# Altium PCB Edge_logic_analyzer.PcbDoc (part 2 of 3)
Units mm, origin at the board's own origin, x right, y up, seen from the top; angles counter-clockwise.
Board outline 76.03 x 55 mm, 4 copper layers (L1, L2, L3, L4), stack 1.527 mm thick; 110 components, 90 nets, 430 pads, 763 vias.
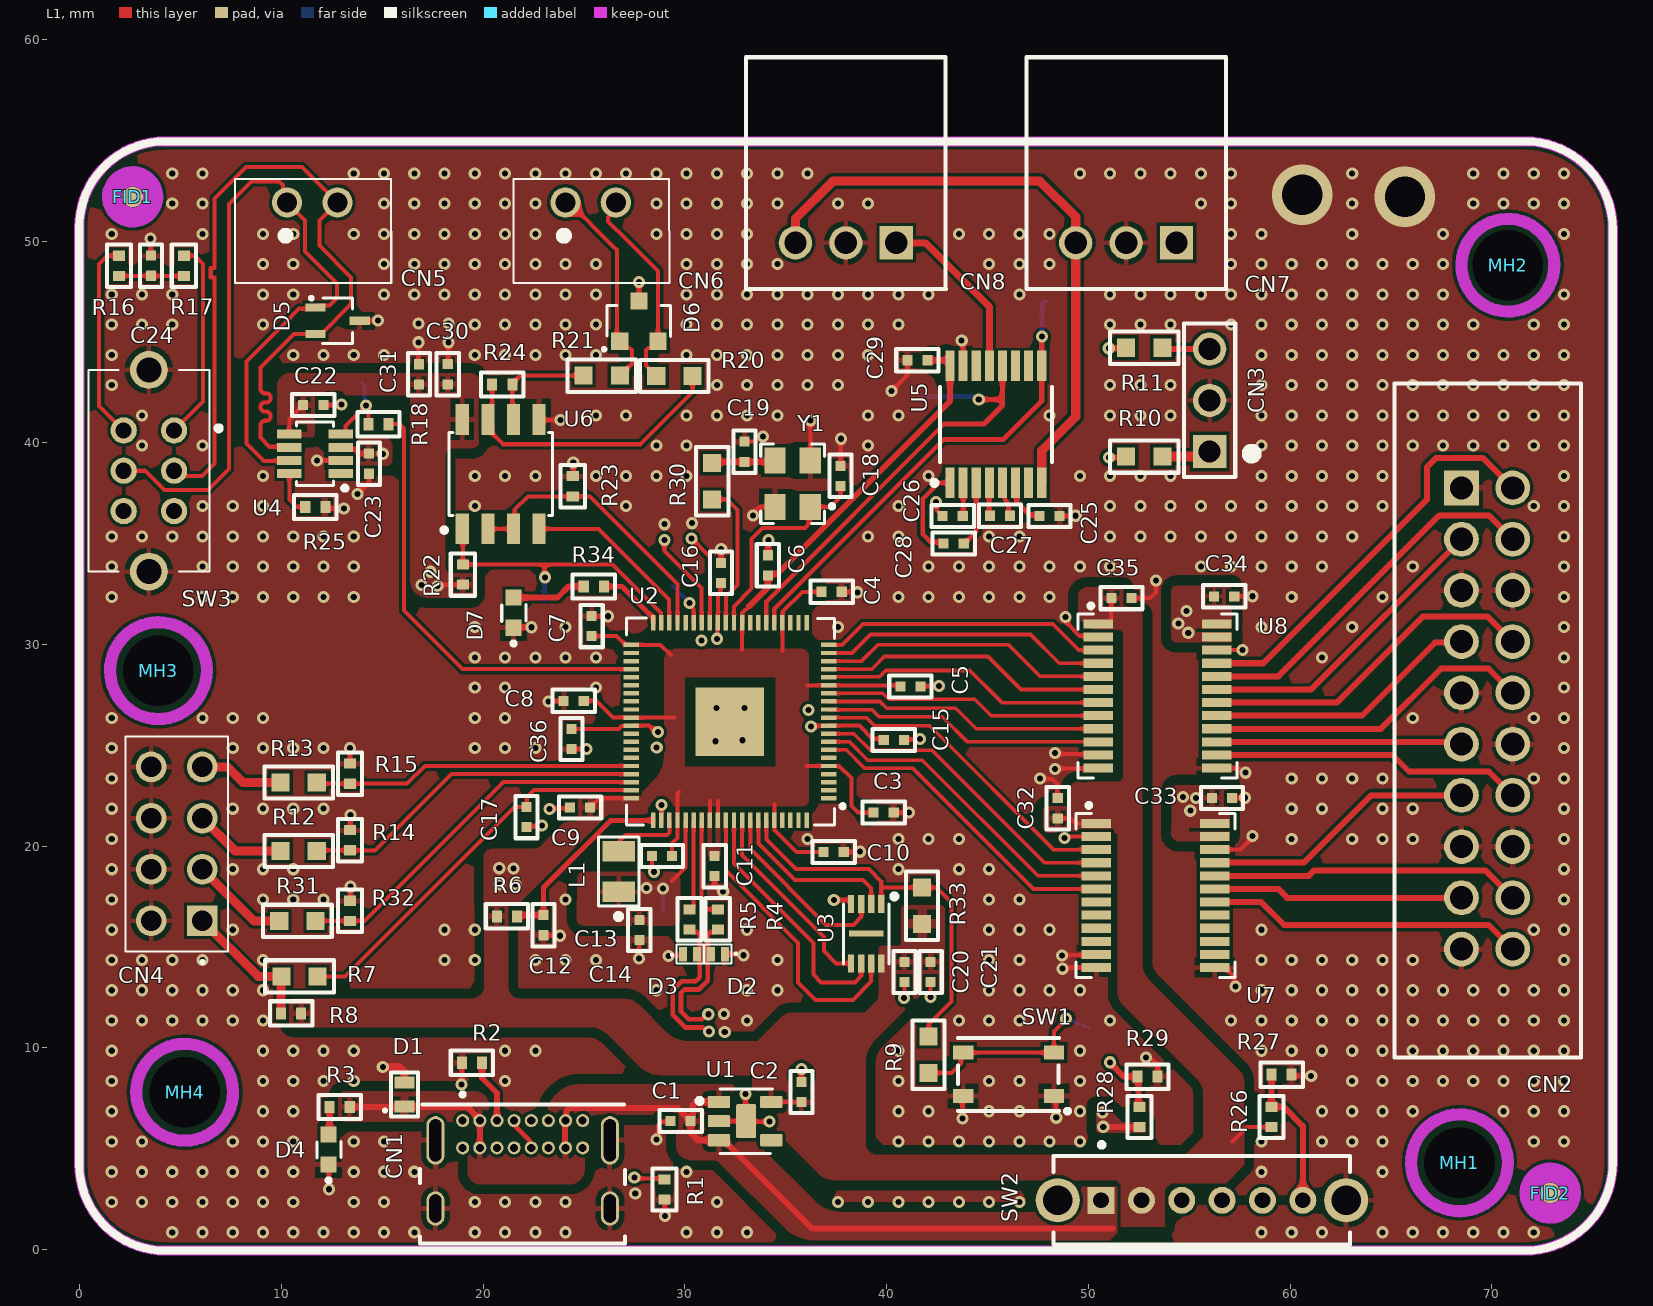
[diagram p0: L1 view]

## Part data (continued)
R4 R5: library part ERJ-2RKF27R0X, "RES- 27R 1/10W  0402 ±1% 0.1W Chip Resistor", Case/Package=0402, Manufacturer 1=Panasonic, Max Operating Temperature=155°C, Min Operating Temperature=-55°C, Package Height=0.35mm, Package Length=1mm, Package Shape=Rectangular, Package Width=0.5mm, Power=100mW, Rated Temperature=70°C, Resistor Type="FIXED RESISTOR", Supplier Part Number=P27.0LCT-ND, Temperature Coefficient (ppm/Cel)=100, Tolerance=1%, Working Voltage=50V, .Mounting=SMT, Category="Chip SMD Resistors", ComponentLink1Description=https://datasheet.ciiva.com:443/pdfs/VipMasterIC/IC/PANA/PANA-S-A0009889626/PANA-S-A0009889626-1.pdf?src-supplier=IHS+Markit, ComponentLink1URL=https://datasheet.ciiva.com:443/pdfs/VipMasterIC/IC/PANA/PANA-S-A0009889626/PANA-S-A0009889626-1.pdf?src-supplier=IHS+Markit, ComponentLink2Description=https://datasheet.ciiva.com/11821/0900766b80f80784-11821276.pdf?src-supplier=Rs, ComponentLink2URL=https://datasheet.ciiva.com/11821/0900766b80f80784-11821276.pdf?src-supplier=Rs, ComponentLink3Description=https://datasheet.ciiva.com/46373/1678782-46373578.pdf?src-supplier=Element14, ComponentLink3URL=https://datasheet.ciiva.com/46373/1678782-46373578.pdf?src-supplier=Element14, ComponentLink4Description=https://datasheet.ciiva.com/46373/1678782-46373579.pdf?src-supplier=Element14, ComponentLink4URL=https://datasheet.ciiva.com/46373/1678782-46373579.pdf?src-supplier=Element14, ComponentLink5Description=https://datasheet.ciiva.com/22681/1678782-22681159.pdf?src-supplier=Element14, ComponentLink5URL=https://datasheet.ciiva.com/22681/1678782-22681159.pdf?src-supplier=Element14, ComponentLink6Description=https://datasheet.ciiva.com/7891/aoa0000ce2-7891306.pdf?src-supplier=Element14, ComponentLink6URL=https://datasheet.ciiva.com/7891/aoa0000ce2-7891306.pdf?src-supplier=Element14, ComponentLink7Description=https://datasheet.ciiva.com/7891/426256-7891578.pdf?src-supplier=Element14, ComponentLink7URL=https://datasheet.ciiva.com/7891/426256-7891578.pdf?src-supplier=Element14, ComponentLink8Description=https://datasheet.ciiva.com/9191/aoa0000ce2-9191129.pdf?src-supplier=Avnet, ComponentLink8URL=https://datasheet.ciiva.com/9191/aoa0000ce2-9191129.pdf?src-supplier=Avnet, ComponentLink9Description=https://datasheet.ciiva.com/9191/aoa0000ce2-9191130.pdf?src-supplier=Avnet, ComponentLink9URL=https://datasheet.ciiva.com/9191/aoa0000ce2-9191130.pdf?src-supplier=Avnet, ComponentLink10Description=https://datasheet.ciiva.com/43467/1678782-43467165.pdf?src-supplier=Farnell, ComponentLink10URL=https://datasheet.ciiva.com/43467/1678782-43467165.pdf?src-supplier=Farnell, Construction=Rectangular, JESD-609 Code=e3, Manufacturer Part Number 1=ERJ-2RKF27R0X, Mounting Technology="Surface Mount", Packaging="Tape and Reel", Pins=2, Pricing="1=0,1, 10=0,028, 100=0,0138, 1000=0,00766, 2500=0,00632, 5000=0,00554 (USD)", Reach SVHC Compliant=Yes, Reference Standard=AEC-Q200, RoHS=Yes, RoHS Compliant=Yes, Stock=682991, Supplier=Digikey, Technology="METAL GLAZE/THICK FILM", Terminal Finish=Nickel, Termination=Wraparound
R6: library part ERJ-2RKF33R0X, "RES - 33R 1/10W 0402 ±1%  Chip Resistor", Case/Package=0402, Manufacturer 1=Panasonic, Max Operating Temperature=155°C, Min Operating Temperature=-55°C, Package Height=0.35mm, Package Length=1mm, Package Shape=Rectangular, Package Width=0.5mm, Power=100mW, Rated Temperature=70°C, Resistor Type="FIXED RESISTOR", Supplier Part Number=P33.0LCT-ND, Temperature Coefficient (ppm/Cel)=100, Tolerance=1%, Working Voltage=50V, .Mounting=SMT, Category="Chip SMD Resistors", ComponentLink1Description=https://datasheet.ciiva.com:443/pdfs/VipMasterIC/IC/PANA/PANA-S-A0009889626/PANA-S-A0009889626-1.pdf?src-supplier=IHS+Markit, ComponentLink1URL=https://datasheet.ciiva.com:443/pdfs/VipMasterIC/IC/PANA/PANA-S-A0009889626/PANA-S-A0009889626-1.pdf?src-supplier=IHS+Markit, ComponentLink2Description=https://datasheet.ciiva.com/11821/0900766b80f80784-11821292.pdf?src-supplier=Rs, ComponentLink2URL=https://datasheet.ciiva.com/11821/0900766b80f80784-11821292.pdf?src-supplier=Rs, ComponentLink3Description=https://datasheet.ciiva.com/5917/aoa0000ce2-5917817.pdf?src-supplier=Farnell, ComponentLink3URL=https://datasheet.ciiva.com/5917/aoa0000ce2-5917817.pdf?src-supplier=Farnell, ComponentLink4Description=https://datasheet.ciiva.com/43467/1678782-43467173.pdf?src-supplier=Farnell, ComponentLink4URL=https://datasheet.ciiva.com/43467/1678782-43467173.pdf?src-supplier=Farnell, ComponentLink5Description=https://datasheet.ciiva.com/9190/aoa0000ce2-9190507.pdf?src-supplier=Avnet, ComponentLink5URL=https://datasheet.ciiva.com/9190/aoa0000ce2-9190507.pdf?src-supplier=Avnet, ComponentLink6Description=https://datasheet.ciiva.com/24023/aoa0000ce2-24023999.pdf?src-supplier=Mouser, ComponentLink6URL=https://datasheet.ciiva.com/24023/aoa0000ce2-24023999.pdf?src-supplier=Mouser, ComponentLink7Description=https://datasheet.ciiva.com/46373/1678782-46373081.pdf?src-supplier=Element14, ComponentLink7URL=https://datasheet.ciiva.com/46373/1678782-46373081.pdf?src-supplier=Element14, ComponentLink8Description=https://datasheet.ciiva.com/46373/1678782-46373082.pdf?src-supplier=Element14, ComponentLink8URL=https://datasheet.ciiva.com/46373/1678782-46373082.pdf?src-supplier=Element14, ComponentLink9Description=https://datasheet.ciiva.com/7836/aoa0000ce2-7836490.pdf?src-supplier=Element14, ComponentLink9URL=https://datasheet.ciiva.com/7836/aoa0000ce2-7836490.pdf?src-supplier=Element14, ComponentLink10Description=https://datasheet.ciiva.com/7836/426256-7836813.pdf?src-supplier=Element14, ComponentLink10URL=https://datasheet.ciiva.com/7836/426256-7836813.pdf?src-supplier=Element14, ComponentLink11Description=https://datasheet.ciiva.com/16777/70260748-16777705.pdf?src-supplier=Allied+Electronics, ComponentLink11URL=https://datasheet.ciiva.com/16777/70260748-16777705.pdf?src-supplier=Allied+Electronics, Construction=Rectangular, JESD-609 Code=e3, Manufacturer Part Number 1=ERJ-2RKF33R0X, Mounting Technology="Surface Mount", Packaging="Tape and Reel", Pins=2, Pricing="1=0,1, 10=0,028, 100=0,0138, 1000=0,00766, 2500=0,00632, 5000=0,00554 (USD)", Reach SVHC Compliant=Yes, Reference Standard=AEC-Q200, RoHS=Yes, RoHS Compliant=Yes, Stock=66806, Supplier=Digikey, Technology="METAL GLAZE/THICK FILM", Terminal Finish=Nickel, Termination=Wraparound
R7: library part RC0603FR-071RL, "RES - 1R 1/10W  0603 ±1%", Case/Package=0603, Manufacturer 1=Yageo, Max Operating Temperature=155°C, Min Operating Temperature=-55°C, Package Height=0.45mm, Package Length=1.6mm, Package Shape=Rectangular, Package Width=0.8mm, Power=100mW, Rated Temperature=70°C, Resistor Type="FIXED RESISTOR", Supplier Part Number=311-1.00HRCT-ND, Temperature Coefficient (ppm/Cel)=200, Tolerance=1%, Working Voltage=75V, .Mounting=SMT, Additional Feature="LASER TRIMMABLE", Category="Chip SMD Resistors", ComponentLink1Description=https://datasheet.ciiva.com:443/pdfs/VipMasterIC/IC/YAGO/YAGO-S-A0008145938/YAGO-S-A0008145938-1.pdf?src-supplier=IHS+Markit, ComponentLink1URL=https://datasheet.ciiva.com:443/pdfs/VipMasterIC/IC/YAGO/YAGO-S-A0008145938/YAGO-S-A0008145938-1.pdf?src-supplier=IHS+Markit, ComponentLink2Description=https://datasheet.ciiva.com/11808/0900766b80f96399-11808162.pdf?src-supplier=Rs, ComponentLink2URL=https://datasheet.ciiva.com/11808/0900766b80f96399-11808162.pdf?src-supplier=Rs, ComponentLink3Description=https://datasheet.ciiva.com/6547/pyu-r-int-thick-7-6547270.pdf?src-supplier=Digikey, ComponentLink3URL=https://datasheet.ciiva.com/6547/pyu-r-int-thick-7-6547270.pdf?src-supplier=Digikey, ComponentLink4Description=https://datasheet.ciiva.com/6547/pyu-r-int-thick-7-6547271.pdf?src-supplier=Digikey, ComponentLink4URL=https://datasheet.ciiva.com/6547/pyu-r-int-thick-7-6547271.pdf?src-supplier=Digikey, ComponentLink5Description=https://datasheet.ciiva.com/7746/1738695-7746296.pdf?src-supplier=Element14, ComponentLink5URL=https://datasheet.ciiva.com/7746/1738695-7746296.pdf?src-supplier=Element14, ComponentLink6Description=https://datasheet.ciiva.com/7746/1738695-7746297.pdf?src-supplier=Element14, ComponentLink6URL=https://datasheet.ciiva.com/7746/1738695-7746297.pdf?src-supplier=Element14, ComponentLink7Description=https://datasheet.ciiva.com/6547/pyu-r-int-thick-7-6547269.pdf?src-supplier=Digikey, ComponentLink7URL=https://datasheet.ciiva.com/6547/pyu-r-int-thick-7-6547269.pdf?src-supplier=Digikey, Construction=Chip, JESD-609 Code=e3, Manufacturer Part Number 1=RC0603FR-071RL, Mounting Technology="Surface Mount", Packaging="Tape and Reel", Pins=2, Pricing="1=0,11, 10=0,012, 100=0,0112, 1000=0,0102 (USD)", Reach SVHC Compliant=Yes, RoHS=Yes, RoHS Compliant=Yes, Stock=71794, Supplier=Digikey, Technology="METAL GLAZE/THICK FILM", Terminal Finish=Nickel, Termination=Wraparound
R8: library part RT0402BRD07200RL, "RES - 200R  0.0625W 0402 0.1%  50V Fixed Resistor, Thin Film", Case/Package=0402, Manufacturer 1=Yageo, Max Operating Temperature=155°C, Min Operating Temperature=-55°C, Package Height=0.3mm, Package Length=1mm, Package Width=0.5mm, Power=62.5mW, Rated Temperature=70°C, Resistor Type="FIXED RESISTOR", Supplier Part Number=49AK4062, Temperature Coefficient (ppm/Cel)=25, Tolerance=0.1%, Working Voltage=50V, .Mounting=SMT, Additional Feature="HIGH PRECISION", Category="Chip SMD Resistors", ComponentLink1Description=https://datasheet.ciiva.com:443/pdfs/VipMasterIC/IC/YAGO/YAGO-S-A0008510989/YAGO-S-A0008510989-1.pdf?src-supplier=IHS+Markit, ComponentLink1URL=https://datasheet.ciiva.com:443/pdfs/VipMasterIC/IC/YAGO/YAGO-S-A0008510989/YAGO-S-A0008510989-1.pdf?src-supplier=IHS+Markit, ComponentLink2Description=https://datasheet.ciiva.com/12705/pyu-rt-1-to-0-05-rohs-l-4-12705967.pdf?src-supplier=Mouser, ComponentLink2URL=https://datasheet.ciiva.com/12705/pyu-rt-1-to-0-05-rohs-l-4-12705967.pdf?src-supplier=Mouser, ComponentLink3Description=https://datasheet.ciiva.com/46635/pyu-rt-1-to-0-05-rohs-l-5-46635174.pdf?src-supplier=Digikey, ComponentLink3URL=https://datasheet.ciiva.com/46635/pyu-rt-1-to-0-05-rohs-l-5-46635174.pdf?src-supplier=Digikey, ComponentLink4Description=https://datasheet.ciiva.com/2582/pyu-rt-1-to-0-05-rohs-l-4-2582220.pdf?src-supplier=Digikey, ComponentLink4URL=https://datasheet.ciiva.com/2582/pyu-rt-1-to-0-05-rohs-l-4-2582220.pdf?src-supplier=Digikey, Construction=Chip, Manufacturer Part Number 1=RT0402BRD07200RL, Mounting Technology="Surface Mount", Packaging="Tape and Reel", Pins=2, Pricing="1=0,198, 25=0,135, 100=0,098, 250=0,087, 500=0,077 (USD)", Reach SVHC Compliant=Yes, RoHS=Yes, RoHS Compliant=Yes, Stock=8493, Supplier=Avnet, Technology="THIN FILM", Termination=Wraparound
R9 R30 R33: library part RMCF0603FT1K00, "RES - 1K 1/10W 0603  ±1%", Case/Package=0603, Manufacturer 1="Stackpole Electronics", Max Operating Temperature=155°C, Min Operating Temperature=-55°C, Package Height=0.45mm, Package Length=1.55mm, Package Shape=Rectangular, Package Width=0.8mm, Power=100mW, Rated Temperature=70°C, Resistor Type="FIXED RESISTOR", Supplier Part Number=RMCF0603FT1K00CT-ND, Temperature Coefficient (ppm/Cel)=100, Tolerance=1%, Working Voltage=75V, .Mounting=SMT, Category="Chip SMD Resistors", ComponentLink1Description=https://datasheet.ciiva.com:443/pdfs/VipMasterIC/IC/SEIE/SEIE-S-A0009541969/SEIE-S-A0009541969-1.pdf?src-supplier=IHS+Markit, ComponentLink1URL=https://datasheet.ciiva.com:443/pdfs/VipMasterIC/IC/SEIE/SEIE-S-A0009541969/SEIE-S-A0009541969-1.pdf?src-supplier=IHS+Markit, ComponentLink2Description=https://www.seielect.com/catalog/SEI-Packaging.pdf?src-supplier=Avnet, ComponentLink2URL=https://www.seielect.com/catalog/SEI-Packaging.pdf?src-supplier=Avnet, ComponentLink3Description=https://www.seielect.com/catalog/SEI-RMCF_RMCP.pdf?src-supplier=Avnet, ComponentLink3URL=https://www.seielect.com/catalog/SEI-RMCF_RMCP.pdf?src-supplier=Avnet, ComponentLink4Description=https://www.seielect.com/catalog/sei-rmcf_rmcp.pdf?src-supplier=Digikey, ComponentLink4URL=https://www.seielect.com/catalog/sei-rmcf_rmcp.pdf?src-supplier=Digikey, ComponentLink5Description=http://www.seielect.com/Catalog/SEI-rmc.pdf?src-supplier=Future+Electronics, ComponentLink5URL=http://www.seielect.com/Catalog/SEI-rmc.pdf?src-supplier=Future+Electronics, ComponentLink6Description=https://datasheet.octopart.com/RMCF0603FT1K00-Stackpole-Electronics-datasheet-11547379.pdf?src-supplier=Future+Electronics, ComponentLink6URL=https://datasheet.octopart.com/RMCF0603FT1K00-Stackpole-Electronics-datasheet-11547379.pdf?src-supplier=Future+Electronics, ComponentLink7Description=https://www.seielect.com/catalog/SEI-Packaging.pdf?src-supplier=Arrow+Electronics, ComponentLink7URL=https://www.seielect.com/catalog/SEI-Packaging.pdf?src-supplier=Arrow+Electronics, ComponentLink8Description=https://www.seielect.com/catalog/SEI-Packaging.pdf?src-supplier=Verical, ComponentLink8URL=https://www.seielect.com/catalog/SEI-Packaging.pdf?src-supplier=Verical, ComponentLink9Description=https://www.seielect.com/catalog/SEI-Packaging.pdf?src-supplier=Quest, ComponentLink9URL=https://www.seielect.com/catalog/SEI-Packaging.pdf?src-supplier=Quest, ComponentLink10Description=https://datasheet.octopart.com/RMCF0603FT1K00-Stackpole-Electronics-datasheet-155966809.pdf?src-supplier=Electro+Sonic, ComponentLink10URL=https://datasheet.octopart.com/RMCF0603FT1K00-Stackpole-Electronics-datasheet-155966809.pdf?src-supplier=Electro+Sonic, ComponentLink11Description=https://datasheet.octopart.com/RMCF0603FT1K00-Stackpole-Electronics-datasheet-155966809.pdf?src-supplier=Master+Electronics, ComponentLink11URL=https://datasheet.octopart.com/RMCF0603FT1K00-Stackpole-Electronics-datasheet-155966809.pdf?src-supplier=Master+Electronics, Construction=Rectangular, JESD-609 Code=e3, Manufacturer Part Number 1=RMCF0603FT1K00, Mounting Technology="Surface Mount", Packaging="Tape and Reel", Pins=2, Pricing="1=0,1, 10=0,02, 100=0,0091, 1000=0,0048, 2500=0,00386 (USD)", Reach SVHC Compliant=Yes, Reference Standard=AEC-Q200, RoHS=Yes, RoHS Compliant=Yes, Stock=2369156, Supplier=Digikey, Technology="METAL GLAZE/THICK FILM", Terminal Finish=Nickel, Termination=Wraparound
R10 R11 R20 R21: library part CRCW0603100RJNEAHP, "RES - 100R  1/3W 0603 (1608 Metric) ±5%", Case/Package=0603, Manufacturer 1="Vishay Dale", Max Operating Temperature=155°C, Min Operating Temperature=-55°C, Package Height=0.45mm, Package Length=1.6mm, Package Shape=Rectangular, Package Width=0.85mm, Power=250mW, Rated Temperature=70°C, Resistor Type="FIXED RESISTOR", Supplier Part Number=541-100SACT-ND, Temperature Coefficient (ppm/Cel)=200, Tolerance=5%, Working Voltage=75V, .Mounting=SMT, Category="Chip SMD Resistors", ComponentLink1Description=https://datasheet.ciiva.com:443/pdfs/VipMasterIC/IC/VISH/VISH-S-A0009391795/VISH-S-A0009391795-1.pdf?src-supplier=IHS+Markit, ComponentLink1URL=https://datasheet.ciiva.com:443/pdfs/VipMasterIC/IC/VISH/VISH-S-A0009391795/VISH-S-A0009391795-1.pdf?src-supplier=IHS+Markit, ComponentLink2Description=https://datasheet.ciiva.com/8979/crcwhpe3-8979829.pdf?src-supplier=Avnet, ComponentLink2URL=https://datasheet.ciiva.com/8979/crcwhpe3-8979829.pdf?src-supplier=Avnet, ComponentLink3Description=https://datasheet.ciiva.com/5562/crcwhpe3-46056-5562229.pdf?src-supplier=Mouser, ComponentLink3URL=https://datasheet.ciiva.com/5562/crcwhpe3-46056-5562229.pdf?src-supplier=Mouser, Construction=Chip, JESD-609 Code=e3, Manufacturer Part Number 1=CRCW0603100RJNEAHP, Mounting Technology="Surface Mount", Packaging="Tape and Reel", Pins=2, Pricing="1=0,14, 10=0,07, 50=0,0458, 100=0,0388, 500=0,02794, 1000=0,0248 (USD)", Reach SVHC Compliant=Yes, Reference Standard=AEC-Q200, RoHS=Yes, RoHS Compliant=Yes, Stock=18342, Supplier=Digikey, Technology="METAL GLAZE/THICK FILM", Terminal Finish=Nickel, Termination=Wraparound
R12 R13 R31: library part RN73H1JTTD3703F100, "RES - 370K  0.1W  0603 1% 75V Fixed Resistor, Thin Film", Manufacturer 1="KOA Speer", Supplier Part Number=2019-RN73H1JTTD3703F100CT-ND, .Mounting=SMT, Category="Chip SMD Resistors", ComponentLink1Description=https://datasheet.ciiva.com:443/pdfs/VipMasterIC/IC/KOAS/KOAS-S-A0009586296/KOAS-S-A0009586296-1.pdf?src-supplier=IHS+Markit, ComponentLink1URL=https://datasheet.ciiva.com:443/pdfs/VipMasterIC/IC/KOAS/KOAS-S-A0009586296/KOAS-S-A0009586296-1.pdf?src-supplier=IHS+Markit, ComponentLink2Description=http://www.mouser.com/ds/2/219/RN73H-12200.pdf?src-supplier=Mouser, ComponentLink2URL=http://www.mouser.com/ds/2/219/RN73H-12200.pdf?src-supplier=Mouser, Manufacturer Part Number 1=RN73H1JTTD3703F100, Pricing="1=0,12, 10=0,103, 50=0,0898, 100=0,0849, 500=0,07462, 1000=0,0708 (USD)", RoHS=Yes, Stock=2861, Supplier=Digikey
R14 R15 R32: library part RC0402JR-07100KL, "RES - 100K  0.0625W 0402 5% 50V Fixed Resistor", Case/Package=0402, Manufacturer 1=Yageo, Max Operating Temperature=155°C, Min Operating Temperature=-55°C, Package Height=0.35mm, Package Length=1mm, Package Shape=Rectangular, Package Width=0.5mm, Power=62.5mW, Rated Temperature=70°C, Resistor Type="FIXED RESISTOR", Supplier Part Number=311-100KJRCT-ND, Temperature Coefficient (ppm/Cel)=100, Tolerance=5%, Working Voltage=50V, .Mounting=SMT, Additional Feature="LASER TRIMMABLE", Category="Chip SMD Resistors", ComponentLink1Description=https://datasheet.ciiva.com:443/pdfs/VipMasterIC/IC/YAGO/YAGO-S-A0008145938/YAGO-S-A0008145938-1.pdf?src-supplier=IHS+Markit, ComponentLink1URL=https://datasheet.ciiva.com:443/pdfs/VipMasterIC/IC/YAGO/YAGO-S-A0008145938/YAGO-S-A0008145938-1.pdf?src-supplier=IHS+Markit, ComponentLink2Description=https://datasheet.ciiva.com/2491/pyu-r-int-thick-7-2491207.pdf?src-supplier=Digikey, ComponentLink2URL=https://datasheet.ciiva.com/2491/pyu-r-int-thick-7-2491207.pdf?src-supplier=Digikey, ComponentLink3Description=https://datasheet.ciiva.com/2491/pyu-r-int-thick-7-2491208.pdf?src-supplier=Digikey, ComponentLink3URL=https://datasheet.ciiva.com/2491/pyu-r-int-thick-7-2491208.pdf?src-supplier=Digikey, ComponentLink4Description=https://datasheet.ciiva.com/2491/pyu-r-int-thick-7-2491209.pdf?src-supplier=Digikey, ComponentLink4URL=https://datasheet.ciiva.com/2491/pyu-r-int-thick-7-2491209.pdf?src-supplier=Digikey, ComponentLink5Description=https://datasheet.ciiva.com/17052/pyu-rc0402-51-rohs-l-6-r-17052137.pdf?src-supplier=Future+Electronics, ComponentLink5URL=https://datasheet.ciiva.com/17052/pyu-rc0402-51-rohs-l-6-r-17052137.pdf?src-supplier=Future+Electronics, ComponentLink6Description=https://datasheet.ciiva.com/12668/pyu-rc0402-51-rohs-l-6-r-12668218.pdf?src-supplier=Mouser, ComponentLink6URL=https://datasheet.ciiva.com/12668/pyu-rc0402-51-rohs-l-6-r-12668218.pdf?src-supplier=Mouser, ComponentLink7Description=https://datasheet.ciiva.com/46394/1018594-46394941.pdf?src-supplier=Element14, ComponentLink7URL=https://datasheet.ciiva.com/46394/1018594-46394941.pdf?src-supplier=Element14, ComponentLink8Description=https://datasheet.ciiva.com/7850/1018594-7850133.pdf?src-supplier=Element14, ComponentLink8URL=https://datasheet.ciiva.com/7850/1018594-7850133.pdf?src-supplier=Element14, Construction=Chip, JESD-609 Code=e3, Manufacturer Part Number 1=RC0402JR-07100KL, Mounting Technology="Surface Mount", Packaging="Tape and Reel", Pins=2, Pricing="1=0,1, 10=0,006, 50=0,0056, 100=0,0051, 500=0,00408, 1000=0,00284 (USD)", Reach SVHC Compliant=Yes, RoHS=Yes, RoHS Compliant=Yes, Stock=5514863, Supplier=Digikey, Technology="METAL GLAZE/THICK FILM", Terminal Finish=Nickel, Termination=Wraparound
R16 R17: library part ERJ-2RKF60R4X, "RES - 60R4  1/10W 0402  ±1%  Chip Resistor", Case/Package=0402, Manufacturer 1=Panasonic, Max Operating Temperature=155°C, Min Operating Temperature=-55°C, Package Height=0.35mm, Package Length=1mm, Package Shape=Rectangular, Package Width=0.5mm, Power=100mW, Rated Temperature=70°C, Resistor Type="FIXED RESISTOR", Supplier Part Number=P60.4LCT-ND, Temperature Coefficient (ppm/Cel)=100, Tolerance=1%, Working Voltage=50V, .Mounting=SMT, Category="Chip SMD Resistors", ComponentLink1Description=https://datasheet.ciiva.com:443/pdfs/VipMasterIC/IC/PANA/PANA-S-A0009889626/PANA-S-A0009889626-1.pdf?src-supplier=IHS+Markit, ComponentLink1URL=https://datasheet.ciiva.com:443/pdfs/VipMasterIC/IC/PANA/PANA-S-A0009889626/PANA-S-A0009889626-1.pdf?src-supplier=IHS+Markit, ComponentLink2Description=https://datasheet.ciiva.com/9188/aoa0000ce2-9188454.pdf?src-supplier=Avnet, ComponentLink2URL=https://datasheet.ciiva.com/9188/aoa0000ce2-9188454.pdf?src-supplier=Avnet, ComponentLink3Description=https://datasheet.ciiva.com/9188/aoa0000ce2-9188457.pdf?src-supplier=Avnet, ComponentLink3URL=https://datasheet.ciiva.com/9188/aoa0000ce2-9188457.pdf?src-supplier=Avnet, ComponentLink4Description=https://datasheet.ciiva.com/16777/70260748-16777353.pdf?src-supplier=Allied+Electronics, ComponentLink4URL=https://datasheet.ciiva.com/16777/70260748-16777353.pdf?src-supplier=Allied+Electronics, ComponentLink5Description=https://datasheet.ciiva.com/16783/70260748-16783483.pdf?src-supplier=Allied+Electronics, ComponentLink5URL=https://datasheet.ciiva.com/16783/70260748-16783483.pdf?src-supplier=Allied+Electronics, ComponentLink6Description=https://datasheet.ciiva.com/7853/aoa0000ce2-7853695.pdf?src-supplier=Element14, ComponentLink6URL=https://datasheet.ciiva.com/7853/aoa0000ce2-7853695.pdf?src-supplier=Element14, ComponentLink7Description=https://datasheet.ciiva.com/46373/1678782-46373448.pdf?src-supplier=Element14, ComponentLink7URL=https://datasheet.ciiva.com/46373/1678782-46373448.pdf?src-supplier=Element14, ComponentLink8Description=https://datasheet.ciiva.com/46373/1678782-46373449.pdf?src-supplier=Element14, ComponentLink8URL=https://datasheet.ciiva.com/46373/1678782-46373449.pdf?src-supplier=Element14, ComponentLink9Description=https://datasheet.ciiva.com/22674/1678782-22674277.pdf?src-supplier=Element14, ComponentLink9URL=https://datasheet.ciiva.com/22674/1678782-22674277.pdf?src-supplier=Element14, Construction=Rectangular, JESD-609 Code=e3, Manufacturer Part Number 1=ERJ-2RKF60R4X, Mounting Technology="Surface Mount", Packaging="Tape and Reel", Pins=2, Pricing="1=0,1, 10=0,028, 100=0,0138, 1000=0,00766, 2500=0,00632, 5000=0,00554 (USD)", Reach SVHC Compliant=Yes, Reference Standard=AEC-Q200, RoHS=Yes, RoHS Compliant=Yes, Stock=175855, Supplier=Digikey, Technology="METAL GLAZE/THICK FILM", Terminal Finish=Nickel, Termination=Wraparound
R18: library part CRCW040210R0FKED, "RES - 10R  1/16W 0402 ±1%  Chip Resistor", Case/Package=0402, Manufacturer 1=Vishay, Max Operating Temperature=155°C, Min Operating Temperature=-55°C, Package Height=0.35mm, Package Length=1mm, Package Shape=Rectangular, Package Width=0.5mm, Power=63mW, Rated Temperature=70°C, Resistor Type="FIXED RESISTOR", Supplier Part Number=541-10.0LCT-ND, Temperature Coefficient (ppm/Cel)=100, Tolerance=1%, Working Voltage=50V, .Mounting=SMT, Category="Chip SMD Resistors", ComponentLink1Description=https://datasheet.ciiva.com:443/pdfs/VipMasterIC/IC/VISH/VISH-S-A0007266705/VISH-S-A0007266705-1.pdf?src-supplier=IHS+Markit, ComponentLink1URL=https://datasheet.ciiva.com:443/pdfs/VipMasterIC/IC/VISH/VISH-S-A0007266705/VISH-S-A0007266705-1.pdf?src-supplier=IHS+Markit, ComponentLink2Description=https://datasheet.ciiva.com/2463/dcrcwe3-2463040.pdf?src-supplier=Digikey, ComponentLink2URL=https://datasheet.ciiva.com/2463/dcrcwe3-2463040.pdf?src-supplier=Digikey, ComponentLink3Description=https://datasheet.ciiva.com/2463/dcrcwe3-2463041.pdf?src-supplier=Digikey, ComponentLink3URL=https://datasheet.ciiva.com/2463/dcrcwe3-2463041.pdf?src-supplier=Digikey, ComponentLink4Description=https://datasheet.ciiva.com/2463/dcrcwe3-2463042.pdf?src-supplier=Digikey, ComponentLink4URL=https://datasheet.ciiva.com/2463/dcrcwe3-2463042.pdf?src-supplier=Digikey, ComponentLink5Description=https://datasheet.ciiva.com/8336/dcrcwe3-8336700.pdf?src-supplier=Avnet, ComponentLink5URL=https://datasheet.ciiva.com/8336/dcrcwe3-8336700.pdf?src-supplier=Avnet, ComponentLink6Description=https://datasheet.ciiva.com/16755/70201119-16755541.pdf?src-supplier=Allied+Electronics, ComponentLink6URL=https://datasheet.ciiva.com/16755/70201119-16755541.pdf?src-supplier=Allied+Electronics, ComponentLink7Description=https://datasheet.ciiva.com/16760/70201119-16760941.pdf?src-supplier=Allied+Electronics, ComponentLink7URL=https://datasheet.ciiva.com/16760/70201119-16760941.pdf?src-supplier=Allied+Electronics, Construction=Chip, JESD-609 Code=e3, Manufacturer Part Number 1=CRCW040210R0FKED, Mounting Technology="Surface Mount", Packaging="Tape and Reel", Pins=2, Pricing="1=0,1, 10=0,03, 100=0,0148, 1000=0,0084 (USD)", Reach SVHC Compliant=Yes, Reference Standard=AEC-Q200, RoHS=Yes, RoHS Compliant=Yes, Stock=496296, Supplier=Digikey, Technology="METAL GLAZE/THICK FILM", Terminal Finish=Nickel, Termination=Wraparound
R24: library part ERA-2AEB121X, "RES - 120R  1/16W  0402  ±0.1% Chip Resistor", Case/Package=0402, Manufacturer 1=Panasonic, Max Operating Temperature=155°C, Min Operating Temperature=-55°C, Package Height=0.35mm, Package Length=1mm, Package Width=0.5mm, Power=63mW, Rated Temperature=85°C, Resistor Type="FIXED RESISTOR", Supplier Part Number=P120DCCT-ND, Temperature Coefficient (ppm/Cel)=25, Tolerance=0.1%, Working Voltage=25V, .Mounting=SMT, Category="Chip SMD Resistors", ComponentLink1Description=https://datasheet.ciiva.com:443/pdfs/VipMasterIC/IC/PANA/PANA-S-A0009459258/PANA-S-A0009459258-1.pdf?src-supplier=IHS+Markit, ComponentLink1URL=https://datasheet.ciiva.com:443/pdfs/VipMasterIC/IC/PANA/PANA-S-A0009459258/PANA-S-A0009459258-1.pdf?src-supplier=IHS+Markit, ComponentLink2Description=https://datasheet.ciiva.com/22737/1776116-22737243.pdf?src-supplier=Element14, ComponentLink2URL=https://datasheet.ciiva.com/22737/1776116-22737243.pdf?src-supplier=Element14, ComponentLink3Description=https://datasheet.ciiva.com/22737/1776116-22737244.pdf?src-supplier=Element14, ComponentLink3URL=https://datasheet.ciiva.com/22737/1776116-22737244.pdf?src-supplier=Element14, ComponentLink4Description=https://datasheet.ciiva.com/24024/aoa0000ce26-197354-24024678.pdf?src-supplier=Mouser, ComponentLink4URL=https://datasheet.ciiva.com/24024/aoa0000ce26-197354-24024678.pdf?src-supplier=Mouser, ComponentLink5Description=https://datasheet.ciiva.com/25720/1776116-25720558.pdf?src-supplier=Farnell, ComponentLink5URL=https://datasheet.ciiva.com/25720/1776116-25720558.pdf?src-supplier=Farnell, ComponentLink6Description=https://datasheet.ciiva.com/9186/aoa0000ce26-9186151.pdf?src-supplier=Avnet, ComponentLink6URL=https://datasheet.ciiva.com/9186/aoa0000ce26-9186151.pdf?src-supplier=Avnet, ComponentLink7Description=https://datasheet.ciiva.com/30070/54aoa0000ce26-30070076.pdf?src-supplier=Onlinecomponents.com, ComponentLink7URL=https://datasheet.ciiva.com/30070/54aoa0000ce26-30070076.pdf?src-supplier=Onlinecomponents.com, Construction=Rectangular, JESD-609 Code=e3, Manufacturer Part Number 1=ERA-2AEB121X, Mounting Technology="Surface Mount", Packaging="Tape and Reel", Pins=2, Pricing="1=0,1, 10=0,082, 50=0,0716, 100=0,0677, 500=0,05944, 1000=0,05637, 5000=0,05076, 10000=0,05153, 20000=0,04948, 30000=0,04884, 50000=0,04563 (USD)", Reach SVHC Compliant=Yes, Reference Standard=AEC-Q200, RoHS=Yes, RoHS Compliant=Yes, Stock=44539, Supplier=Digikey, Technology="THIN FILM", Terminal Finish=Nickel, Termination=Wraparound
SW1: "SWITCH - Tactile Switch SPST-NO Top Actuated Surface Mount", Manufacturer 1="ITT C&K", Supplier Part Number=CKN12215-1-ND, .Mounting=SMT, Category="Tactile Switches", ComponentLink1Description=https://datasheet.octopart.com/PTS815-SJM-250-SMTR-LFS-C%26K-Components-datasheet-175421037.pdf?src-supplier=Element14, ComponentLink1URL=https://datasheet.octopart.com/PTS815-SJM-250-SMTR-LFS-C%26K-Components-datasheet-175421037.pdf?src-supplier=Element14, ComponentLink2Description=https://dznh3ojzb2azq.cloudfront.net/products/Tactile/PTS815/documents/datasheet.pdf?src-supplier=Digikey, ComponentLink2URL=https://dznh3ojzb2azq.cloudfront.net/products/Tactile/PTS815/documents/datasheet.pdf?src-supplier=Digikey, ComponentLink3Description=https://datasheet.octopart.com/PTS815-SJM-250-SMTR-LFS-C%26K-Components-datasheet-175421037.pdf?src-supplier=Farnell, ComponentLink3URL=https://datasheet.octopart.com/PTS815-SJM-250-SMTR-LFS-C%26K-Components-datasheet-175421037.pdf?src-supplier=Farnell, ComponentLink4Description=https://datasheet.octopart.com/PTS815SJM250SMTRLFS-C%26K-Components-datasheet-166147782.pdf?src-supplier=TME, ComponentLink4URL=https://datasheet.octopart.com/PTS815SJM250SMTRLFS-C%26K-Components-datasheet-166147782.pdf?src-supplier=TME, Manufacturer Part Number 1=PTS815SJM250SMTRLFS, Pricing="1=0,22, 10=0,191, 25=0,1788, 100=0,1606, 250=0,14892, 500=0,14052, 1000=0,13263 (USD)", RoHS=Yes, Stock=10550, Supplier=Digikey
SW2: "SWITCH - Slide Switch SP4T Through Hole, Right Angle", Manufacturer 1="Same Sky", Mouser Part Number=179-SLW1478444ARASD, .Mounting=PTH, Arrow Part Number=SLW-147844-4A-RA-S-D, Arrow Price/Stock=https://www.arrow.com/en/products/slw-147844-4a-ra-s-d/cui-devices?utm_currency=USD&region=nac, Datasheet Link=https://www.sameskydevices.com/product/resource/slw-147844-4a-ra-s-d.pdf, Height=5mm, Manufacturer Part Number 1=SLW-147844-4A-RA-S-D, Mouser Price/Stock=https://www.mouser.co.uk/ProductDetail/Same-Sky/SLW-147844-4A-RA-S-D?qs=IKkN%2F947nfAwyC%2FZGCUEUg%3D%3D
SW3: "SWITCH - Slide Switch DPDT Through Hole, Right Angle", Manufacturer 1=E-Switch, Mouser Part Number=612-EG2208, .Mounting=PTH, Datasheet Link=https://configured-product-images.s3.amazonaws.com/2D/specs/EG2208.pdf, Height=5mm, Manufacturer Part Number 1=EG2208, Mouser Price/Stock=https://www.mouser.co.uk/ProductDetail/E-Switch/EG2208?qs=xDsBkp9LkodhU1lD9QrRVw%3D%3D
TP1 TP2 TP3 TP4 TP5 TP6 TP7: library part Test_Point, "MECH - Test Points"
U1: library part TLV75533PDBVR, "LDO - Fixed Regulator 3.3V 500mA SOT-23-5", Manufacturer 1="Texas Instruments", Supplier Part Number 1=595-TLV75533PDBVR, .Mounting=SMT, Category="Voltage Regulators - Linear", ComponentLink1Description=https://www.ti.com:443/lit/ds/symlink/tlv755p.pdf?src-supplier=IHS+Markit, ComponentLink1URL=https://www.ti.com:443/lit/ds/symlink/tlv755p.pdf?src-supplier=IHS+Markit, ComponentLink2Description=http://www.ti.com/lit/ds/symlink/tlv755p.pdf?src-supplier=Digikey, ComponentLink2URL=http://www.ti.com/lit/ds/symlink/tlv755p.pdf?src-supplier=Digikey, ComponentLink3Description=http://www.ti.com/general/docs/suppproductinfo.tsp?distId=10&amp;gotoUrl=http%3A%2F%2Fwww.ti.com%2Flit%2Fgpn%2Ftlv755p&src-supplier=Digikey, ComponentLink3URL=http://www.ti.com/general/docs/suppproductinfo.tsp?distId=10&amp;gotoUrl=http%3A%2F%2Fwww.ti.com%2Flit%2Fgpn%2Ftlv755p&src-supplier=Digikey, JESD-609 Code=e3, Manufacturer Part Number 1=TLV75533PDBVR, Moisture Sensitivity Level=1, Pricing="1=0,32, 10=0,218, 50=0,194, 100=0,167, 1000=0,14, 10000=0,123 (USD)", Reach SVHC Compliant=Yes, Regulator Type="FIXED POSITIVE SINGLE OUTPUT LDO REGULATOR", RoHS=Yes, RoHS Compliant=Yes, Stock=22700, Supplier 1=Mouser, Terminal Finish=Tin
U2: "IC - MCU - ARM Microcontrollers - MCU RP2350B 150MHz clock Dual Arm Cortex-M33 cores 520KB RAM 8KB on-chip QFN-80", Manufacturer 1=RASPBERRY-PI, Mouser Part Number=358-SC1510, .Mounting=SMT, Datasheet Link=https://datasheets.raspberrypi.com/rp2350/rp2350-datasheet.pdf, Height=0.9mm, Manufacturer Part Number 1=SC1510, Mouser Price/Stock=https://www.mouser.co.uk/ProductDetail/Raspberry-Pi/SC1510?qs=jcD%2FCkGBYePv%252BTwvNgU%2F3g%3D%3D
U3: library part "W25Q32RVXHJQ TR", "IC - FLASH - NOR Memory IC 32Mbit SPI - Quad I/O 133 MHz 8-XSON (2x3)", Manufacturer 1=Winbond, Mouser Part Number=454-W25Q32RVXHJQTR, .Mounting=SMT, Arrow Part Number="W25Q32RVXHJQ TR", Arrow Price/Stock=https://www.arrow.com/en/products/w25q32rvxhjq-tr/winbond-electronics?utm_currency=USD&region=nac, Datasheet Link=https://www.winbond.com/hq/product/code-storage-flash-memory/serial-nor-flash/?__locale=ja&partNo=W25Q32RV, Height=0.4mm, Manufacturer Part Number 1="W25Q32RVXHJQ TR", Mouser Price/Stock=https://www.mouser.co.uk/ProductDetail/Winbond/W25Q32RVXHJQ-TR?qs=mELouGlnn3dFwM4lg8JCig%3D%3D
U4: "IC - Transceiver Half CANbus TSOT-23-8", Manufacturer 1="Texas Instruments", Mouser Part Number=595-TCAN1044AVDDFRQ1, .Mounting=SMT, Arrow Part Number=TCAN1044AVDDFRQ1, Arrow Price/Stock=https://www.arrow.com/en/products/tcan1044avddfrq1/texas-instruments?utm_currency=USD&region=europe, Datasheet Link=https://www.ti.com/lit/gpn/tcan1044av-q1, Height=1.1mm, Manufacturer Part Number 1=TCAN1044AVDDFRQ1, Mouser Price/Stock=https://www.mouser.co.uk/ProductDetail/Texas-Instruments/TCAN1044AVDDFRQ1?qs=7D1LtPJG0i2h5Rps6Zy%2FQg%3D%3D
U5: "IC - Transceiver Full-Duplex RS232 2-Channel, Data Rate 250kbps 16-TSSOP.", Case/Package=TSSOP, Manufacturer 1="Texas Instruments", Manufacturer Part Number 2=MAX3232IPWR, Manufacturer Part Number 3=MAX3232ECPWR, Max Operating Temperature=85°C, Max Supply Voltage=5.5V, Min Operating Temperature=-40°C, Min Supply Voltage=3V, Operating Supply Current=1mA, Operating Supply Voltage=5V, Package Quantity=2000, Supplier Part Number 1=296-13096-1-ND, .Mounting=SMT, Category 1="RS-232 / RS-422 / RS-485 Interface ICs", ComponentLink1Description=https://datasheet.ciiva.com/22694/1823586-22694378.pdf?src-supplier=Element14, ComponentLink1URL=https://datasheet.ciiva.com/22694/1823586-22694378.pdf?src-supplier=Element14, ComponentLink2Description=https://datasheet.ciiva.com/8064/1823586-8064567.pdf?src-supplier=Element14, ComponentLink2URL=https://datasheet.ciiva.com/8064/1823586-8064567.pdf?src-supplier=Element14, ComponentLink3Description=https://datasheet.ciiva.com/46394/1882754-46394522.pdf?src-supplier=Element14, ComponentLink3URL=https://datasheet.ciiva.com/46394/1882754-46394522.pdf?src-supplier=Element14, ComponentLink4Description=https://datasheet.ciiva.com/46397/1882754-46397997.pdf?src-supplier=Element14, ComponentLink4URL=https://datasheet.ciiva.com/46397/1882754-46397997.pdf?src-supplier=Element14, ComponentLink5Description=https://datasheet.ciiva.com/1702/max3232-1702785.pdf?src-supplier=Digi-Key, ComponentLink5URL=https://datasheet.ciiva.com/1702/max3232-1702785.pdf?src-supplier=Digi-Key, ComponentLink6Description=https://datasheet.ciiva.com/1702/max3232-1702784.pdf?src-supplier=Digi-Key, ComponentLink6URL=https://datasheet.ciiva.com/1702/max3232-1702784.pdf?src-supplier=Digi-Key, ComponentLink7Description=https://datasheet.ciiva.com/1702/max3232-1702786.pdf?src-supplier=Digi-Key, ComponentLink7URL=https://datasheet.ciiva.com/1702/max3232-1702786.pdf?src-supplier=Digi-Key, Data Rate=250Kbps, Description 1="3- to 5.5-V dual channel 250kbps RS-232 line driver/receiver with +/-15-kV ESD protection 16-TSSOP 0 to 70", Height=1mm, Lead Free="Lead Free", Length=5mm, Logic Function=Transceiver,Receiver, Manufacturer 2="Texas Instruments", Manufacturer 3="Texas Instruments", Manufacturer Part Number 1=MAX3232CPWR, Mounting Technology="Surface Mount", Number of Channels=2, Number of Drivers=2, Number of Receivers=2, Number of Transceivers=1, Number of Transmitters=2, Packaging="Tape and Reel", Pins=16, Pricing 1="1=0,99, 10=0,849, 50=0,849, 100=0,652, 1000=0,454, 10000=0,387 (USD)", Radiation Hardening=No, Reach SVHC Compliant=No, Receiver Hysteresis=300mV, RoHS 1=Yes, RoHS Compliant=Yes, Series=-, Simplex/Duplex="Full Duplex", Stock 1=15299, Supplier 1=Digikey, Supply Current=1mA, Supply Type=Single, Termination=SMD/SMT, Weight=0.002183oz, Width=4.4mm
U6: "IC - Transceiver Half RS422, RS485 8-SOIC", Manufacturer 1="Texas Instruments", Mouser Part Number=595-THVD1400DR, .Mounting=SMT, Arrow Part Number=THVD1400DR, Arrow Price/Stock=https://www.arrow.com/en/products/thvd1400dr/texas-instruments?utm_currency=USD&region=nac, Datasheet Link=https://www.arrow.com/en/products/thvd1400dr/texas-instruments, Height=1.75mm, Manufacturer Part Number 1=THVD1400DR, Mouser Price/Stock=https://www.mouser.co.uk/ProductDetail/Texas-Instruments/THVD1400DR?qs=eP2BKZSCXI7bzZdDjIHgHQ%3D%3D
U7 U8: "IC - Translation Transceiver 1 Element 8 Bit per Element 3-State Output 24-TSSOP", Manufacturer 1=Nexperia, Mouser Part Number=771-74LVC8T245PW118, .Mounting=SMT, Arrow Part Number=74LVC8T245PW,118, Arrow Price/Stock=https://www.arrow.com/en/products/74lvc8t245pw118/nexperia?region=nac, Datasheet Link=https://assets.nexperia.com/documents/data-sheet/74LVC_LVCH8T245.pdf, Height=1.1mm, Manufacturer Part Number 1=74LVC8T245PW,118, Mouser Price/Stock=https://www.mouser.co.uk/ProductDetail/Nexperia/74LVC8T245PW118?qs=jquClx72t9C%2Fd6XxNRL47g%3D%3D
Y1: "IC - CRYSTAL 12 MHz ±30ppm Crystal 10pF 50 Ohms 4-SMD, No Lead", Manufacturer 1=ABRACON, Mouser Part Number=815-ABM8-272-T3, .Mounting=SMT, Datasheet Link=https://abracon.com/datasheets/ABM8-272-T3.pdf, Height=0.8mm, Manufacturer Part Number 1=ABM8-272-T3, Mouser Price/Stock=https://www.mouser.co.uk/ProductDetail/ABRACON/ABM8-272-T3?qs=QpmGXVUTftEj6miOiJBMxQ%3D%3D

## Via types
v1: diameter 0.6, hole 0.3, L1 to L4, tented both sides, 761 vias
v2: diameter 3, hole 2, L1 to L4, 2 vias

## Nets (pads, with @x,y where several pads share a name; then routed paths per layer and width w, separated by ;. In a path a pad name is that pad's centre, name@x,y a point inside that pad or via, vN(x,y) a via of type N, cw(c..) or ccw(c..) an arc to the next point about the centre after c; other vN are vias at no path point)
485_A: CN6.1 D6.1 R21.2 | length 10.4
  L1 w0.2: CN6.1@24.076,51.912 24.271,51.912 26.42,49.763 26.625,49.558 26.625,45.175 D6.1@26.767,45.032 27.092,44.707 27.25,44.707 27.367,44.59 27.367,43.915 R21.2@26.778,43.326
485_B: CN6.2 D6.2 R20.2 | length 10.3
  L1 w0.2: CN6.2@26.576,51.912 26.576,51.56 26.194,51.178 26.194,50.979 27.12,50.053 28.667,48.506 D6.2@28.667,45.032 28.342,44.707 28.184,44.707 28.067,44.59 28.067,43.827 R20.2@28.581,43.313
+1V1: C13.2 C15.2 C16.2 C36.2 L1.1 TP1.1 U2.10 U2.32 U2.51 U2.65 | length 16.4
  L1 w0.2: C36.2@24.376,25.812 26.706,25.812 26.859,25.965 27.327,25.965 U2.51@27.337,25.975 28.232,25.975 28.549,25.658 v1(28.658,25.658) ; 29.369,18.284 30.033,18.948 U2.65@30.033,21.278 ; v1(31.591,30.281) 31.623,30.313 31.623,31.045 31.643,31.065 31.643,32.497 31.761,32.615 31.761,33.013 C16.2@31.796,33.048 ; v1(36.246,25.936) 36.275,25.965 37.12,25.965 U2.10@37.13,25.975 38.658,25.975 39.31,25.324 39.803,25.324 C15.2@39.858,25.269
  L4 w0.2: v1(28.098,17.923) v1(28.916,17.904) TP1.1@28.916,16.868
+1V65: R26.2 R27.2 SW2.6 | length 7.2
  L1 w0.3: R27.2@59.083,8.671 R26.2@59.083,7.071 59.683,7.071 60.633,6.121 SW2.6@60.633,2.444
+2V5: R28.2 R29.1 SW2.5 | length 19
  L1 w0.3: v1@51.076,9.256 51.76,8.571 R29.1@52.433,8.571 52.483,8.521 52.483,7.121 R28.2@52.533,7.071
  L3 w0.3: v1(51.078,9.285) 51.611,8.752 51.611,2.082 52.928,0.765 57.235,0.765 58.633,2.164 SW2.5@58.633,2.444
+3V3: C2.1 C3.1 C4.1 C5.1 C6.2 C7.1 C8.1 C9.1 C10.2 C11.1 C14.2 C20.2 C21.2 C22.1 C29.2 C30.2 C31.2 C32.2 C35.2 R6.2 R8.2 R22.2 R26.1 R33.2 SW2.2 U1.5 U2.5 U2.15 U2.24 U2.29 U2.41 U2.50 U2.60 U2.64 U2.68 U2.69 U2.76 U3.8 U4.5 U5.16 U6.8 U7.1 U8.1 | length 65.3
  L1 w0.2: U4.5@10.389,40.424 10.389,41.184 C22.1@11.076,41.87 ; v1@17.742,32.965 R22.2@18.991,32.965 ; v1(20.795,18.906) v1@20.804,18.898 ; v1@21.497,18.898 v1(21.506,18.889) ; C8.1@24.985,27.206 25.607,27.206 26.428,26.385 27.327,26.385 U2.50@27.337,26.375 29.475,26.375 ; C9.1@25.303,21.922 25.756,22.375 U2.60@27.337,22.375 ; C7.1@25.376,30.412 26.62,30.412 27.057,29.975 U2.41@27.337,29.975 28.798,29.975 29.306,29.467 ; C14.2@29.365,19.519 29.365,20.145 29.633,20.413 U2.64@29.633,21.278 29.633,22.613 29.701,22.681 ; U2.68@31.233,21.278 31.233,22.237 ; U2.69@31.633,21.278 31.633,22.241 ; 32.832,29.744 U2.29@32.833,31.071 ; U2.29@32.843,31.081 32.843,31.549 33.188,31.894 ; U1.5@34.283,7.321 34.287,7.317 35.772,7.317 C2.1@35.776,7.312 ; 34.433,22.089 U2.76@34.433,21.278 34.443,21.268 34.443,20.8 35.531,19.712 C10.2@36.876,19.712 ; 34.833,29.666 U2.24@34.833,31.071 34.843,31.081 34.843,31.632 35.823,32.612 C4.1@36.776,32.612 ; 36.038,23.975 U2.5@37.13,23.975 37.134,23.971 37.65,23.971 38.251,23.369 38.251,21.993 38.582,21.662 C3.1@39.354,21.662 ; 36.079,27.975 U2.15@37.13,27.975 40.617,27.975 C5.1@40.681,27.91 ; C32.2@48.487,21.381 49.119,21.381 49.237,21.264 49.237,21.247 49.354,21.129 U7.1@50.395,21.129 ; U8.1@50.495,31.019 51.007,31.019 51.132,31.144 51.132,31.638 51.147,31.652 C35.2@51.147,32.295 ; 57.153,5.368 57.856,6.071 R26.1@59.083,6.071
  L1 w0.3: 33.188,31.894 34.112,32.818 C6.2@34.112,33.422 34.185,33.495 34.576,33.495 43.143,42.062 U5.16@43.143,43.811 43.143,44.089 C29.2@42.027,44.089
  other v1: 20.804,18.092 21.593,18.101 17.738,32.894 16.95,32.949 17.394,33.603
+VBUS: C1.1 C23.1 CN1.A4 CN1.A9 CN1.B4 CN1.B9 D1.1 R3.2 R28.1 SW2.1 U1.1 U1.3 U4.3 | length 48.1
  L1 w0.254: U4.3@12.939,39.774 13.037,39.676 13.635,39.676 13.846,39.465 C23.1@14.337,39.465
  L1 w0.3: R3.2@13.383,7.071 19.204,7.071 19.833,6.442 CN1.A4@19.833,6.394 CN1.B9@19.833,5.044 ; CN1.A9@24.044,6.181 24.063,6.161 24.063,5.064 CN1.B4@24.083,5.044 ; CN1.A9@24.083,6.394 24.12,6.431 24.12,6.853 24.295,7.029 29.627,7.029 C1.1@30.288,6.369 ; U1.1@31.683,7.321 30.564,7.321 30.388,7.145 30.388,6.469 C1.1@30.288,6.369 ; v1(50.741,6.088) 50.75,6.079 52.524,6.079 R28.1@52.533,6.071 ; 51.228,1.039 36.315,1.039 31.933,5.421 U1.3@31.683,5.421 30.651,5.421 30.288,5.785 C1.1@30.288,6.369
  L3 w0.3: v1(15.021,39.452) v1@15.091,39.452 ; CN1.B9@19.833,5.044 CN1.A4@19.833,6.394 CN1.A4@19.833,6.442 ; CN1.B4@24.083,5.044 CN1.A9@24.083,6.394
  other v1: 50.7,6.8
+VREF: C33.2 C34.2 SW2.3 SW2.4 U7.23 U7.24 U8.23 U8.24
  other v1: 55.055,21.757 55.333,22.379 54.686,22.44 54.954,30.578 54.461,31.042 54.866,31.657
ADC1_VDIV: CN4.3 R31.2 | length 4.9
  L1 w0.45: CN4.3@6.076,18.847 8.628,16.296 R31.2@9.892,16.296
ADC2_VDIV: CN4.5 R12.2 | length 4.5
  L1 w0.45: CN4.5@6.076,21.387 7.703,19.76 R12.2@9.948,19.76
ADC3_VDIV: CN4.7 R13.2 | length 4.2
  L1 w0.45: CN4.7@6.076,23.927 7.319,23.927 8.087,23.16 R13.2@9.948,23.16
CAN_H: CN5.1 D5.1 SW3.5 U4.7 | length 40.7
  L1 w0.2: SW3.5@2.682,38.612 3.244,38.612 4.2,37.656 6.351,37.656 7.387,38.692 7.387,51.826 8.523,52.962 9.888,52.962 10.065,52.785 10.065,52.124 CN5.1@10.276,51.912 11.176,51.012 11.176,49.485 12.755,47.906 12.755,47.167 12.387,46.798 11.777,46.798 D5.1@11.678,46.699 ; U4.7@10.11,39.102 9.121,39.102 8.26,39.963 8.26,44.031 10.123,45.894 10.878,46.649 D5.1@11.678,46.649
CAN_L: CN5.2 D5.2 SW3.2 U4.6 | length 40.6
  L1 w0.2: SW3.2@5.14,38.356 6.061,38.356 6.687,38.982 6.687,48.104 6.687,48.204 6.494,48.204 6.494,48.658 6.687,48.658 6.687,49.017 6.687,52.116 8.233,53.662 11.026,53.662 CN5.2@12.776,51.912 11.876,51.012 11.876,49.775 13.455,48.196 13.455,46.877 11.978,45.399 D5.2@11.678,45.399 10.618,45.399 10.413,45.194 8.96,43.741 8.96,43.085 8.96,42.679 ccw(c9.187,42.679) 9.187,42.452 9.237,42.452 cw(c9.237,42.225) 9.237,41.998 9.187,41.998 ccw(c9.187,41.771) 9.187,41.544 9.237,41.544 cw(c9.237,41.317) 9.237,41.09 9.187,41.09 ccw(c9.187,40.863) 8.96,40.863 8.96,40.309 8.96,40.252 9.411,39.802 U4.6@10.035,39.802